# Altium PCB CAN Breakout.PcbDoc
Units mil, origin at the board's own origin, x right, y up, seen from the top; angles counter-clockwise.
Board outline 1955 x 881 mil, 2 copper layers (Top Layer, Bottom Layer); 14 components, 10 nets, 42 pads, 3 vias.
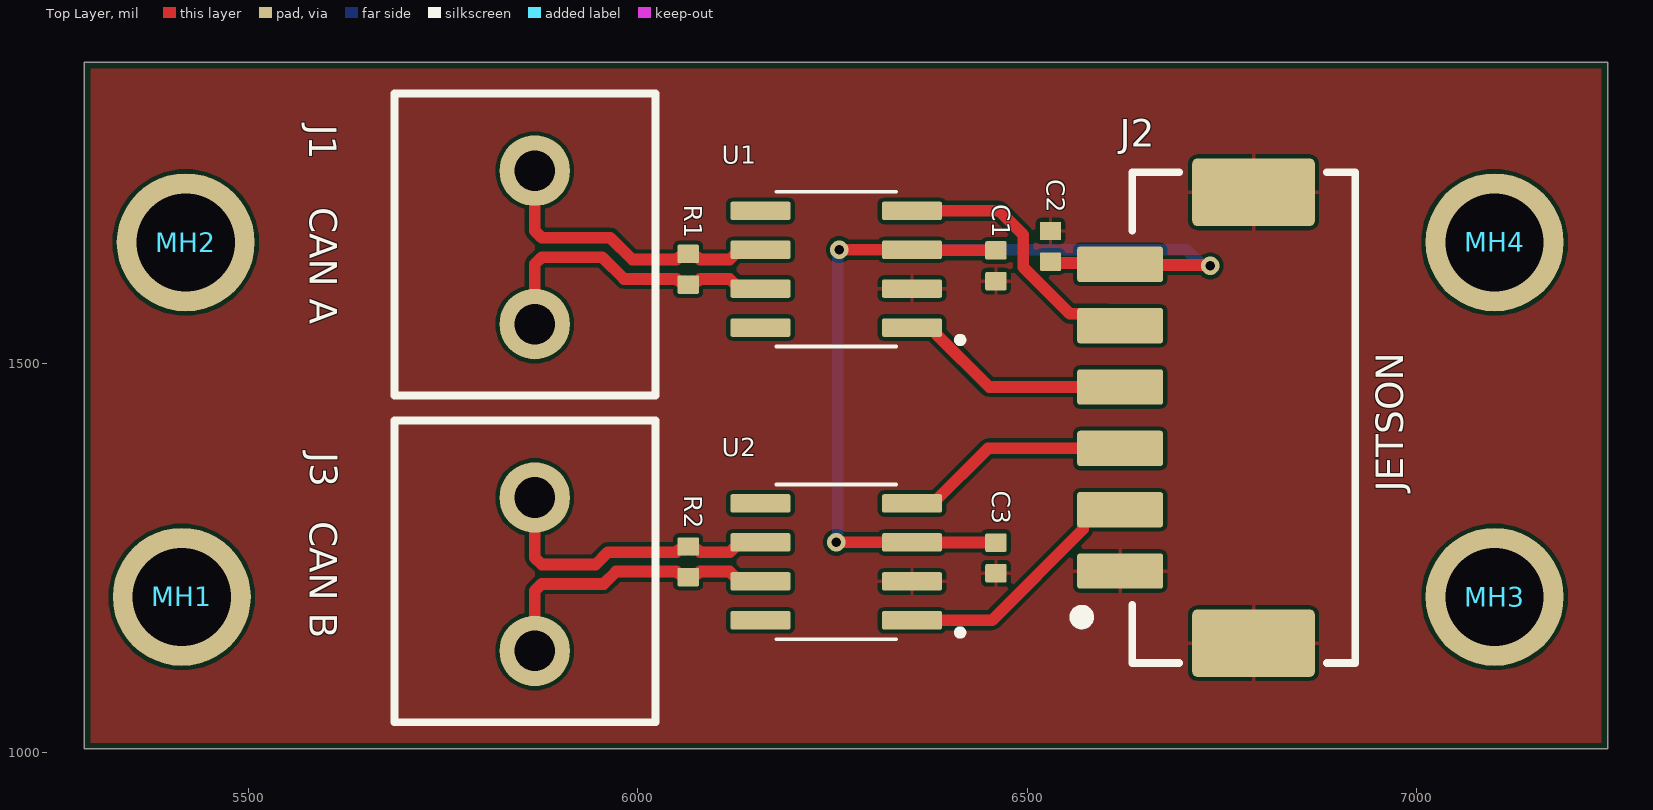
[diagram p0: Top Layer view]
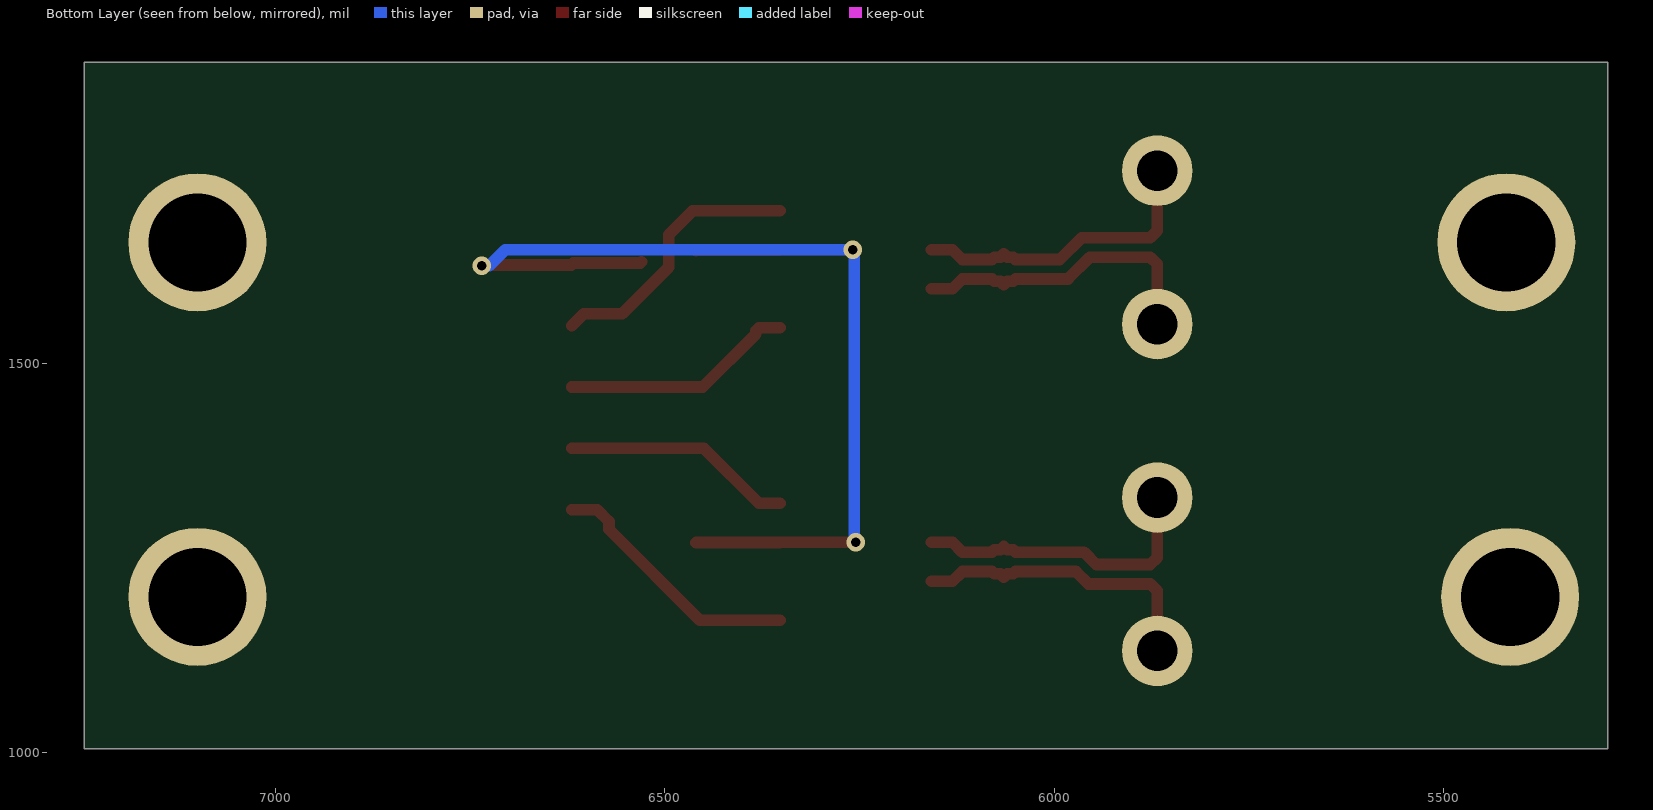
[diagram p1: Bottom Layer view, seen from below]
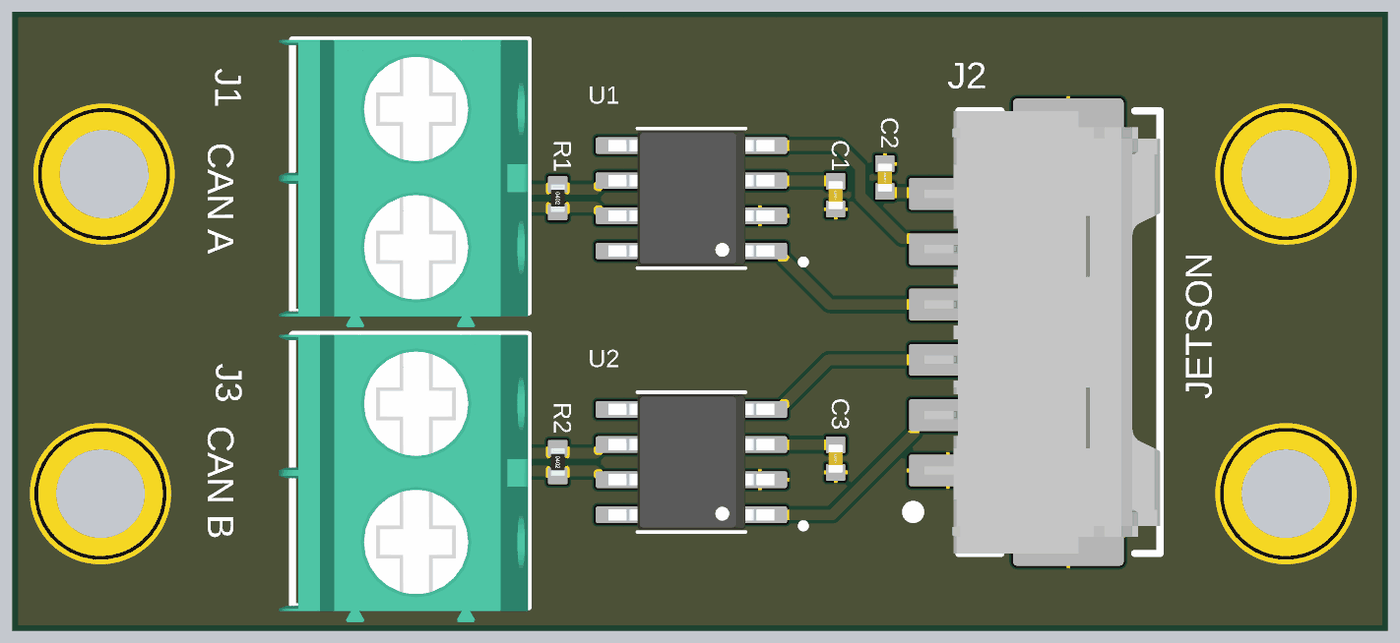
[diagram p2: 3D render of the assembled board from above, using the file's embedded part models]

## Layer stack, top to bottom
Top Solder: solder mask 0.4, Solder Resist, Dk 3.5
Top Layer: signal copper 1.4
Dielectric 1: dielectric 12.6, FR-4, Dk 4.8
Bottom Layer: signal copper 1.4
Bottom Solder: solder mask 0.4, Solder Resist, Dk 3.5

## Board outline
5290,1005 7245,1005 7245,1886 5290,1886

## Design rules (kind name [scope] priority, off if disabled: settings)
BoardOutlineClearance [All] p1: gap=7.87 ignorepadtopadclearanceinfootprint=FALSE
Clearance [All] p1: gap=5 ignorepadtopadclearanceinfootprint=FALSE except(9.84: Arc-Hole Track-Hole SMDPad-Hole THPad-Hole Via-Hole Fill-Hole Poly-Hole Region-Hole Text-Hole)
ComponentClearance [All] p1: gap=5 collisioncheckmode=3 verticalgap=5 showdistances=TRUE
DiffPairsRouting DiffPairsRouting_120 [InDifferentialPairClass('120')] p1: maxlimit=10 minlimit=10 mostfreqgap=10 toplayer_minwidth=15 toplayer_maxwidth=15 toplayer_prefwidth=15 bottomlayer_minwidth=15 bottomlayer_maxwidth=15 bottomlayer_prefwidth=15 maxuncoupledlength=500
Height [All] p1: minheight=0 maxheight=71497.94 prefheight=500
HoleSize [All] p1: absolutevalues=TRUE maxlimit=248.03 minlimit=11.81 maxpercent=80.000 minpercent=20.000
HoleToHoleClearance [All] p1: gap=9.84 allowstackedmicrovias=FALSE
MinimumAnnularRing [All] p1: minimumring=3
MinimumSolderMaskSliver [All] p1: minsoldermaskwidth=0
PlaneClearance [All] p1: clearance=5
PlaneConnect PlaneConnectPowerPads [InPadClass('PowerPads')] p1: planeconnectstyle=Direct reliefexpansion=20 reliefentries=4 reliefconductorwidth=10 reliefairgap=10
PlaneConnect [All] p2: pad.planeconnectstyle=Relief pad.reliefexpansion=11.81 pad.reliefentries=4 pad.reliefconductorwidth=5 pad.reliefairgap=5 via.planeconnectstyle=Direct via.reliefexpansion=11.81 via.reliefentries=4 via.reliefconductorwidth=5 via.reliefairgap=5
PolygonConnect PolygonConnectPowerPads [All vs (InPadClass('PowerPads'))] p1: connectstyle=Direct reliefconductorwidth=10 reliefentries=4 polygonreliefangle="90 Angle" airgapwidth=10
PolygonConnect [All] p2: thpad.connectstyle=Relief thpad.reliefconductorwidth=5 thpad.reliefentries=4 thpad.polygonreliefangle="90 Angle" thpad.airgapwidth=5 smdpad.connectstyle=Relief smdpad.reliefconductorwidth=5 smdpad.reliefentries=4 smdpad.polygonreliefangle="90 Angle" smdpad.airgapwidth=5 via.connectstyle=Direct via.reliefconductorwidth=5 via.reliefentries=4 via.polygonreliefangle="90 Angle" via.airgapwidth=5
RoutingVias [All] p1: holewidth=11.81 width=23.62 viastyle="Through Hole" minholewidth=11.81 minwidth=23.62 maxholewidth=23.62 maxwidth=259.84
SilkToSilkClearance [All] p1: silktosilkclearance=0
SilkToSolderMaskClearance [IsPad] p1: minsilkscreentomaskgap=5 clearancetoexposedcopper=TRUE
SolderMaskExpansion [All] p1: expansion=2.95 istentingtop=FALSE
Width [All] p1: maxlimit=1000 minlimit=5 preferedwidth=5 minimp=50.000000 maximp=50.000000 favimp=50.000000
20 further rules are at their usual default settings.

## Classes and differential pairs
differential pair class 120: CAN1 CAN2
differential pair CAN2: +CAN2_P -CAN2_N
differential pair CAN1: +CAN1_P -CAN1_N

## Components (designator, comment, footprint, x,y, rotation, side; value= is the part's Value field where it differs from the comment)
C1 "CAP_0.1uF_10V_0402" CAP0402 6460,1625 r90 top value=0.1µF
C2 "CAP_0.1uF_10V_0402" CAP0402 6530,1650 r270 top value=0.1µF
C3 "CAP_0.1uF_10V_0402" CAP0402 6460,1250 r90 top value=0.1µF
J1 "CON_2POS_SCREW_TERM" 1935161 5868,1648.57 r270 top
J2 "CON_6M_SM_RA" MOLEX-5024940670 6705,1430 r90 top
J3 "CON_2POS_SCREW_TERM" 1935161 5868,1229.12 r270 top
MH1 "MOUNTING_HOLE_M3" MOUNTING_HOLE_3mm#1 5415,1240 r90 top
MH2 "MOUNTING_HOLE_M3" MOUNTING_HOLE_3mm#2 5420,1640.25 r90 top
MH3 "MOUNTING_HOLE_M3" MOUNTING_HOLE_3mm#3 7100,1200 r90 top
MH4 "MOUNTING_HOLE_M3" MOUNTING_HOLE_3mm#3 7100,1655 r90 top
R1 "RES_120Ω_0402_5%" RES0402 6065,1620.56 r270 top value=120Ω
R2 "RES_120Ω_0402_5%" RES0402 6065,1245 r270 top value=120Ω
U1 "TCAN332DR" SOIC127P599X175-8N 6255,1620.56 r180 top
U2 "TCAN332DR" SOIC127P599X175-8N 6255,1245 r180 top

## Footprints (in the part's own frame and the unit in brackets; to place one, negate y for a bottom-side part, rotate by r counter-clockwise, add the part's x,y. Pads: shape width x height; smd on the part's side, far side on the other; paste and mask are expansions set on the pad)
1935161 [mm] "TERM BLK 2POS SIDE ENTRY 5MM PCB"
  round 2.3 hole 1.325: 1(-2.5,0) 2(2.5,0)
  silkscreen extent -5.01,-4.57 4.83,3.94, body extent -5.01,-5.06 5.39,3.94, height 11.41
CAP0402 [mm] "Chip Capacitor, Body 1x0.5mm, Height 0.35mm, IPC Medium Density"
  rrect15% 0.6x0.7 smd: 1(-0.5,0) 2(0.5,0)
  body extent -0.52,-0.28 0.52,0.28, height 0.54
MOLEX-5024940670 [mm] "Molex 5024940670 6 pin 2mm pitch SMD RA connector"
  rrect15% 2.2x4 smd: 0(-7.35,-2.175) 0(7.35,-2.175)
  rrect15% 1.15x2.8 smd: 1(-5,2.175) 2(-3,2.175) 3(-1,2.175) 4(1,2.175) 5(3,2.175) 6(5,2.175)
  silkscreen extent -8,-5.49 8,3.62, body extent -8,-5.49 8,3.01, height 6.91
MOUNTING_HOLE_3mm#1 [mm] "3mm Hole"
  round 4.5 hole 3.2 mask+0.3: 0(-1.016,0)
MOUNTING_HOLE_3mm#2 [mm] "3mm Hole"
  round 4.5 hole 3.2 mask+0.3: 0(0.375,0)
MOUNTING_HOLE_3mm#3 [mm] "3mm Hole"
  round 4.5 hole 3.2 mask+0.3: 0(0,0)
RES0402 [mm] "Chip Resistor, Body 1x0.5mm, IPC Medium Density"
  rrect15% 0.6x0.7 smd: 1(-0.5,0) 2(0.5,0)
  body extent -0.5,-0.25 0.5,0.25, height 0.27
SOIC127P599X175-8N [mm]
  rrect25% 1.97x0.6 smd: 1(-2.47,1.905) 2(-2.47,0.635) 3(-2.47,-0.635) 4(-2.47,-1.905) 5(2.47,-1.905) 6(2.47,-0.635) 7(2.47,0.635) 8(2.47,1.905)
  silkscreen extent -4.14,-2.52 1.95,2.52, body extent -3,-2.45 3,2.45, height 1.75

## Part data
C1 C2 C3: "CAP CER 0.1UF 10V X7R 0402", Manufacturer 1="Murata Electronics", Manufacturer Part Number 1=GRM155R71A104KA01D, Package/Footprint=0402, Supplier Part Number 1=490-6321-1-ND, Voltage Rating=10V, Supplier 1=Digi-Key
J1 J3: "TERM BLK 2POS SIDE ENTRY 5MM", Manufacturer 1="Phoenix Contact", Manufacturer Part Number 1=1935161, Package/Footprint=SMD, Supplier Part Number 1=277-1667-ND, Mounting Type=TH, Supplier 1=Digi-Key
J2: "CONN HEADER SMD RIGHT ANGLE 2MM PITCH", Current Rating=3A, Manufacturer 1=Molex, Manufacturer Part Number 1=502494-0670, Supplier Part Number 1=WM2283CT-ND, Voltage Rating=250V, Orientation="Right Angle", Pitch=2mm, Supplier 1=Digi-Key
R1: "RES 120 OHM 5% 1/16W 0402", Manufacturer 1=Yageo, Manufacturer Part Number 1=RC0402JR-07120RL, Package/Footprint=0402, Power=1/16W, Supplier Part Number 1=311-120JRCT-ND, Tolerance=5%, Mounting Type=SMD, Supplier 1=Digi-Key
R2: "RES 120 OHM 5% 1/16W 0402", Manufacturer 1=Yageo, Manufacturer Part Number 1=RC0402JR-07120RL, Power=1/16W, Supplier Part Number 1=311-120JRCT-ND, Tolerance=5%, Mounting Type=SMD, Supplier 1=Digi-Key
U1 U2: "IC CAN TRANSCEIVER", Manufacturer 1="Texas Instruments", Supplier Part Number 1=296-43711-1-ND, Manufacturer Part Number 1=TCAN332DR, Supplier 1=Digi-Key

## Via types
v1: diameter 24, hole 12, Top Layer to Bottom Layer, 3 vias

## Nets (pads, with @x,y where several pads share a name; then routed paths per layer and width w, separated by ;. In a path a pad name is that pad's centre, name@x,y a point inside that pad or via, vN(x,y) a via of type N, cw(c..) or ccw(c..) an arc to the next point about the centre after c; other vN are vias at no path point)
3V3: C1.2 C2.2 C3.2 J2.6 U1.3 U2.3 | length 1475.9
  Top Layer w15: v1(6255,1270) U2.3 6352.4,1269.84 6459.84,1269.84 C3.2 ; v1(6258.84,1645.69) 6258.97,1645.56 U1.3 6352.68,1645.12 6459.56,1645.12 C1.2 ; C2.2 6531.73,1628.58 6617.64,1628.58 J2.6 6620.3,1625.93 6734.07,1625.93 v1(6735,1625)
  Bottom Layer w15: v1(6255,1270) 6256.92,1271.92 6256.92,1643.77 v1(6258.84,1645.69) 6704.84,1645.69 6725.53,1625 v1(6735,1625)
CAN1_N: J1.1 R1.1 U1.6 | length 393.3
  Top Layer w15: J1.1 5868,1669.86 5876.79,1661.07 5964.99,1661.07 5993.01,1633.06 6049.93,1633.06 6052.81,1635.94 6060.69,1635.94 R1.1 6069.31,1635.94 6077.19,1635.94 6080.07,1633.06 6118.29,1633.06 6130.79,1645.56 U1.6
CAN1_P: J1.2 R1.2 U1.7 | length 393.3
  Top Layer w15: J1.2 5868,1627.29 5876.79,1636.07 5954.64,1636.07 5982.65,1608.06 6049.93,1608.06 6052.81,1605.19 6060.69,1605.19 R1.2 6069.31,1605.19 6077.19,1605.19 6080.07,1608.06 6118.29,1608.06 6130.79,1595.56 U1.7
CAN1_RX: J2.4 U1.1 | length 301
  Top Layer w15: U1.1 6379.21,1545.56 6383.52,1541.25 6383.52,1537.37 6451.52,1469.37 J2.4
CAN1_TX: J2.5 U1.4 | length 352.8
  Top Layer w15: U1.4 6464.44,1695.56 6495,1665 6495,1623.08 6554.84,1563.25 6604.23,1563.25 J2.5
CAN2_N: J3.1 R2.1 U2.6 | length 388.2
  Top Layer w15: J3.1 5868,1250.4 5876.79,1241.62 5946.06,1241.62 5961.94,1257.5 6049.93,1257.5 6052.81,1260.37 6060.69,1260.37 R2.1 6069.31,1260.37 6077.19,1260.37 6080.07,1257.5 6118.29,1257.5 6130.79,1270 U2.6
CAN2_P: J3.2 R2.2 U2.7 | length 388.2
  Top Layer w15: J3.2 5868,1207.83 5876.79,1216.62 5956.41,1216.62 5972.3,1232.5 6049.93,1232.5 6052.81,1229.63 6060.69,1229.63 R2.2 6069.31,1229.63 6077.19,1229.63 6080.07,1232.5 6118.29,1232.5 6130.79,1220 U2.7
CAN2_RX: J2.2 U2.1 | length 331.8
  Top Layer w15: U2.1 6455,1170 6571.75,1286.75 6571.75,1296.75 6586.89,1311.89 J2.2
CAN2_TX: J2.3 U2.4 | length 296.4
  Top Layer w15: U2.4 6379.21,1320 6449.84,1390.63 J2.3
GND: C1.1 C2.1 C3.1 J2.0 J2.1 U1.2 U2.2
pads on no net: MH1.0 MH2.0 MH3.0 MH4.0 U1.5 U1.8 U2.5 U2.8

## Polygon pours and split planes (outlines as drawn)
GND on Top Layer "NONET_L04_P-001" (solid, remove dead copper, pour order 0): 5269,1893 7245,1893 7245,987 5269,987

## Silkscreen, mask and mechanical layers (free items; w line width, h text height)
Top Overlay:
  text "CAN A" at 5567.66,1700 h60 r270
  text "JETSON" at 6994.34,1334.9 h60 r90
  text "CAN B" at 5567.66,1297 h60 r270